# EAGLE board Teensy-Maxuino-Slave-A4988-stepper 2x shield v3 backup (EAGLE 6.4)
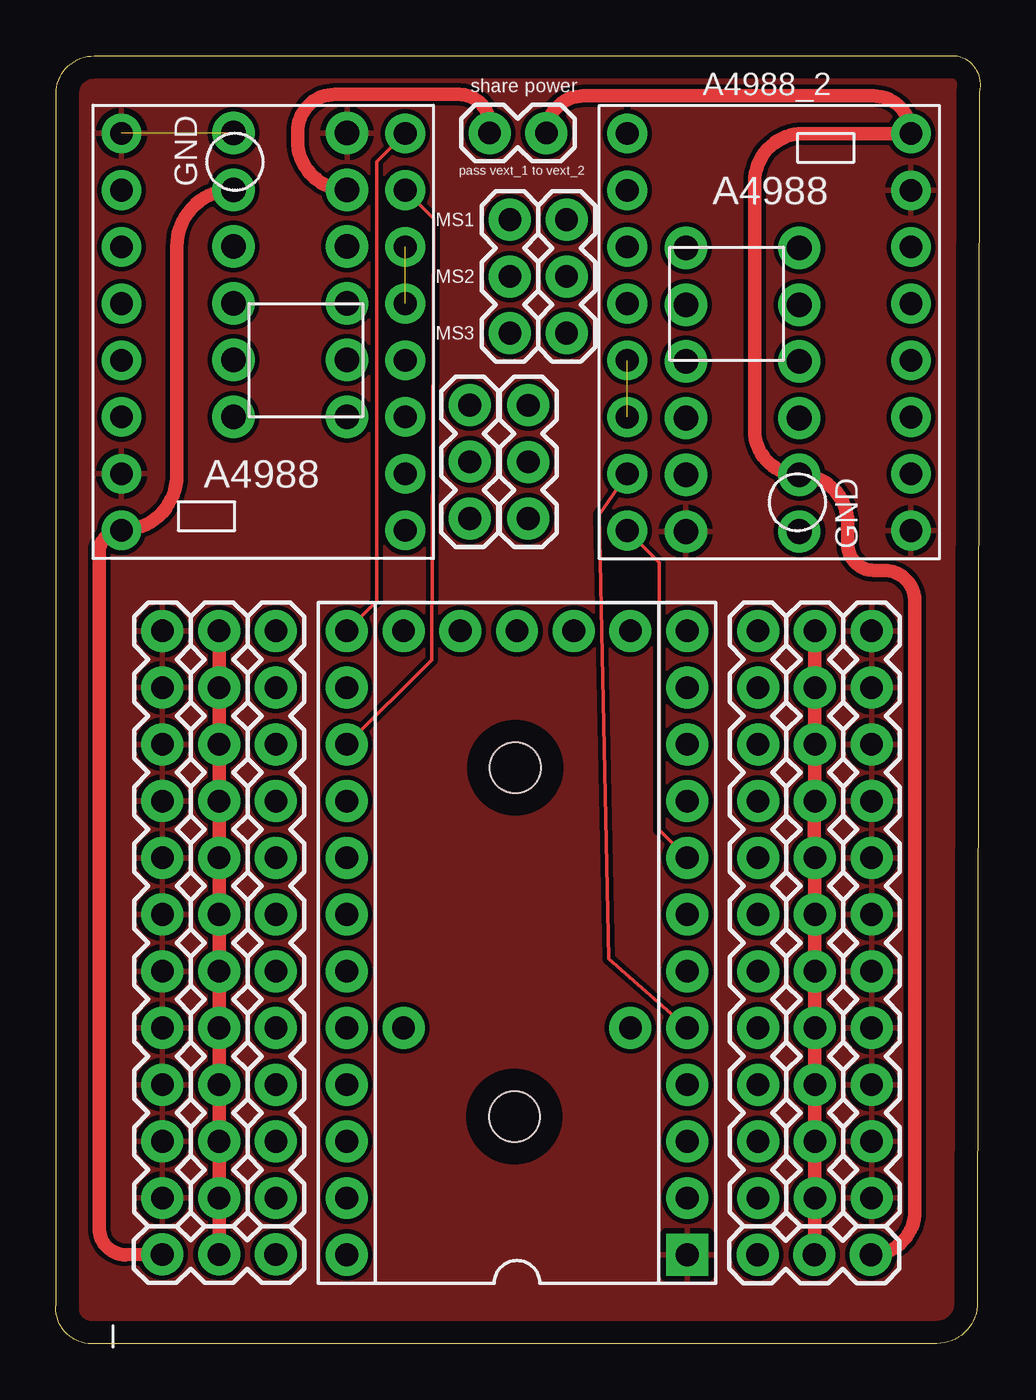
[diagram p0: board, top side]
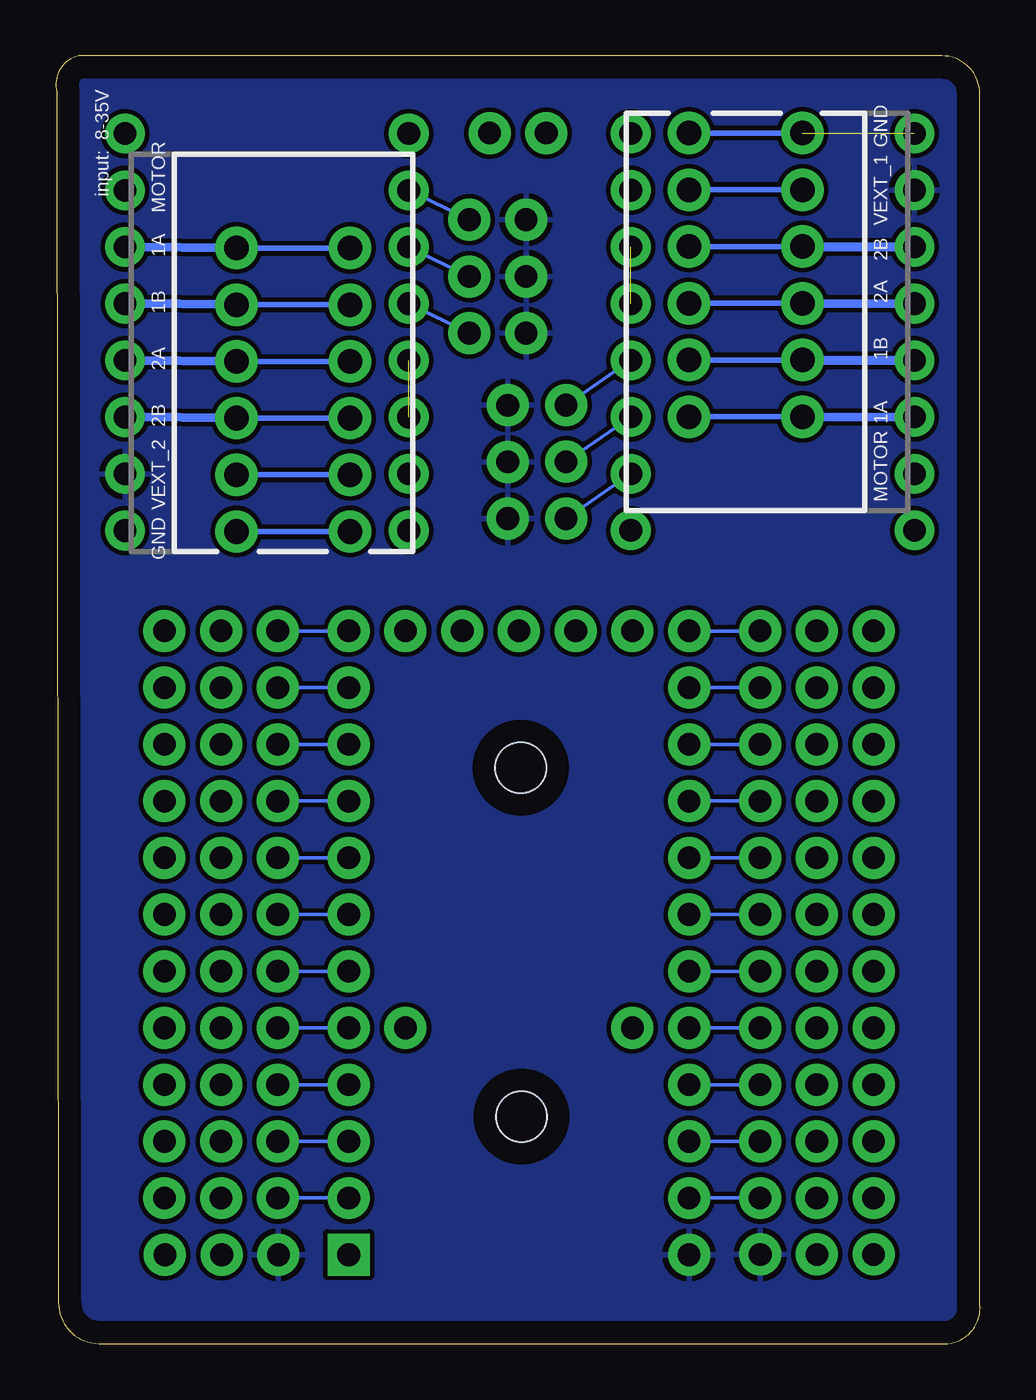
[diagram p1: board, bottom side, seen from below]

Size 41.38 x 57.68 mm. Coordinates in mm from the lower left corner, seen from the top.
Outline: 0.01,1.76 0.01,55.97 arc-90 1.72,57.68 40.36,57.68 arc-90 41.34,56.07 41.26,1.85 arc-90 39.45,0 1.44,0 arc-90 0.01,1.76
Copper layers (1*16): Top 0.035mm / dielectric 1.5mm / Bottom 0.035mm
Design rules "default *": minimum track width 6mil, minimum drill 24mil, track to track 8mil, track to pad 8mil, pad to pad 8mil, via to via 8mil, smd to smd 8mil, copper to edge 40mil, drill to drill 6mil, minimum pad ring 10mil, minimum via ring 8mil, stop-mask expansion 4mil, vias tented up to drill 0mil, thermal gap 10mil
Net classes: 0 default: width 0.152 mm, clearance 0.152 mm; 1 GND: width 0.406 mm, clearance 0.152 mm; 2 Power: width 0.406 mm, clearance 0.152 mm
Holes 2.26 mm at 20.53,10.17 20.57,25.8

## Footprints (pad centres in the part's own frame; a part is rotated, then mirrored left to right if it is on the bottom)
1X03 = drill 1.016 pad 1.88: 1 0,0; 2 2.54,0; 3 5.08,0
TEENSY = drill 1.016 pad 1.88: 5V2 13.97,-2.54; +5V -13.97,7.62; B0 -11.43,-7.62; B1 -8.89,-7.62; B2 -6.35,-7.62; B3 -3.81,-7.62; B4 8.89,7.62; B5 6.35,7.62; B6 3.81,7.62; B7 -1.27,-7.62; C6 11.43,-7.62; C7 13.97,-7.62; D0 1.27,-7.62; D1 3.81,-7.62; D2 6.35,-7.62; D3 8.89,-7.62; D4 13.97,5.08; D5 13.97,-5.08; D6 13.97,7.62; D7 11.43,7.62; E6 -3.81,-5.08; F0 -11.43,7.62; F1 -8.89,7.62; F4 -6.35,7.62; F5 -3.81,7.62; F6 -1.27,7.62; F7 1.27,7.62; GRND1 13.97,0; REF -3.81,5.08; RST 13.97,2.54 | drill 1.016 pad 1.88 square: GND -13.97,-7.62
POLOLU_A4988 = drill 1.016 pad 1.778: 1A 6.35,-1.27; 1B 6.35,-3.81; 2A 6.35,1.27; 2B 6.35,3.81; DIR -6.35,-8.89; EN -6.35,8.89; GND 6.35,-8.89; GND_MOT 6.35,6.35; MS1 -6.35,6.35; MS2 -6.35,3.81; MS3 -6.35,1.27; RST -6.35,-1.27; SLP -6.35,-3.81; STEP -6.35,-6.35; V_MOT 6.35,8.89; VDD 6.35,-6.35
1X11 = drill 1.016 pad 1.88: 1 0,0; 2 2.54,0; 3 5.08,0; 4 7.62,0; 5 10.16,0; 6 12.7,0; 7 15.24,0; 8 17.78,0; 9 20.32,0; 10 22.86,0; 11 25.4,0
1X02 = drill 1.016 pad 1.88: 1 0,0; 2 2.54,0
SPRINGTERMINAL-2.54MM-6 = drill 1.1 pad 1.9: 1 2.54,-2.54; 2 0,-2.54; 3 -2.54,-2.54; 4 -5.08,-2.54; 5 5.08,-2.54; 6 7.62,-2.54; P$1 2.54,2.54; P$2 0,2.54; P$3 -2.54,2.54; P$4 -5.08,2.54; P$5 5.08,2.54; P$6 7.62,2.54

## Placement (x,y rotation side)
+5V  [1X03]  21.15,36.95 90 top
+5V1  [1X03]  20.33,45.26 90 top
_1  TEENSY  [TEENSY]  20.65,17.95 90 top
A4988_1  POLOLU_A4988  [POLOLU_A4988]  9.29,45.31 180 top
A4988_2  POLOLU_A4988  [POLOLU_A4988]  31.93,45.3 0 top
GND_1  M11PTH  [1X11]  36.52,31.92 270 top
GND_2  M11PTH  [1X11]  4.77,31.92 270 top
MICROSTEP  [1X03]  18.53,42.04 270 top
MICROSTEP1  [1X03]  22.87,45.26 90 top
PINS_1  M11PTH  [1X11]  31.44,31.92 270 top
PINS_2  M11PTH  [1X11]  9.85,6.52 90 top
SHARE  [1X02]  19.42,54.22 0 top
STEPPER  [SPRINGTERMINAL-2.54MM-6]  10.5,46.59 90 bottom
STEPPER1  [SPRINGTERMINAL-2.54MM-6]  30.74,43.99 270 bottom
V+_1  M11PTH  [1X11]  33.98,31.92 270 top
V+_2  M11PTH  [1X11]  7.31,31.92 270 top
VSEL_1  [1X03]  36.49,3.98 180 top
VSEL_2  [1X03]  4.77,4 0 top

## Library data of the parts
+5V +5V1 GND_1 GND_2 V+_1 V+_2 = SparkFun-Connectors
_1 = aliEagleLib
A4988_1 = aliEagleLib; A4988_1: 1
A4988_2 = aliEagleLib; A4988_2: 2
MICROSTEP = SparkFun-Connectors; 5V: +5V; MS1: ms1; MS2: ms2; MS3: ms3
MICROSTEP1 = SparkFun-Connectors; MS1: ms1; MS2: ms2; MS3: ms3
PINS_1 = SparkFun-Connectors; GND: gnd; PINS: pins; V: V+
PINS_2 = SparkFun-Connectors; GND: gnd; PINS: pin; V: V+
SHARE = SparkFun-Connectors; P: pass vext_1 to vext_2; SHARE: share power
STEPPER = aliEagleLib; 1A: 1a; 1B: 1b; 2A: 2a; 2B: 2b; DC: input:; GND: gnd; MOTOR: motor; VEX: VEXT_1; VEX2: GND; VEXT: 8-35V
STEPPER1 = aliEagleLib; 1A: 1as; 1B: 1b; 2A: 2A; 2B: 2B; GND: GND; MOTOR: motor; VEXT_2: VEXT_2
VSEL_1 = SparkFun-Connectors; VCC: vcc; VEXT: vext
VSEL_2 = SparkFun-Connectors; VCC: VCC; VEXT: VEXT

## Nets
+5V: +5V1.1 +5V1.2 +5V1.3 +5V.1 +5V.2 +5V.3 _1.+5V A4988_1.VDD A4988_2.VDD VSEL_1.3 VSEL_2.3
DIR: _1.D6 A4988_1.DIR PINS_2.11
DIR1: _1.D1 A4988_2.DIR PINS_1.5
GND [GND]: _1.GND A4988_1.GND A4988_1.GND_MOT A4988_2.GND A4988_2.GND_MOT GND_1.1 GND_1.2 GND_1.3 GND_1.4 GND_1.5 GND_1.6 GND_1.7 GND_1.8 GND_1.9 GND_1.10 GND_1.11 GND_2.1 GND_2.2 GND_2.3 GND_2.4 GND_2.5 GND_2.6 GND_2.7 GND_2.8 GND_2.9 GND_2.10 GND_2.11 STEPPER1.P$6 STEPPER.P$6
N$1 [Power]: A4988_1.2B STEPPER.P$4
N$2 [Power]: A4988_1.2A STEPPER.P$3
N$3 [Power]: A4988_1.1A STEPPER.P$2
N$4 [Power]: A4988_1.1B STEPPER.P$1
N$5: A4988_2.RST A4988_2.SLP
N$6: A4988_1.RST A4988_1.SLP
N$7: A4988_2.MS1 MICROSTEP1.3
N$8: A4988_1.MS1 MICROSTEP.3
N$9: A4988_1.MS2 MICROSTEP.2
N$10: A4988_1.MS3 MICROSTEP.1
N$11: A4988_2.MS2 MICROSTEP1.2
N$12: A4988_2.MS3 MICROSTEP1.1
N$13: A4988_2.2B STEPPER1.P$4
N$14 [Power]: A4988_2.2A STEPPER1.P$3
N$15 [Power]: A4988_2.1A STEPPER1.P$2
N$16 [Power]: A4988_2.1B STEPPER1.P$1
N$17: _1.B0 PINS_1.11
N$18: _1.D0 PINS_1.6
N$19: _1.B7 PINS_1.7
N$20: _1.C6 PINS_1.2
N$21: _1.D3 PINS_1.3
N$22: _1.D2 PINS_1.4
N$23: _1.C7 PINS_1.1
N$24: _1.B2 PINS_1.9
N$25: _1.B1 PINS_1.10
N$26: _1.F4 PINS_2.3
N$27: _1.F5 PINS_2.4
N$28: _1.F6 PINS_2.5
N$29: _1.F7 PINS_2.6
N$30: _1.B6 PINS_2.7
N$31: _1.B5 PINS_2.8
N$32: _1.D7 PINS_2.10
N$33: _1.F0 PINS_2.1
N$34: _1.F1 PINS_2.2
STEP: _1.B4 A4988_1.STEP PINS_2.9
STEP1: _1.B3 A4988_2.STEP PINS_1.8
V+_1: V+_1.1 V+_1.2 V+_1.3 V+_1.4 V+_1.5 V+_1.6 V+_1.7 V+_1.8 V+_1.9 V+_1.10 V+_1.11 VSEL_1.2
V+_2: V+_2.1 V+_2.2 V+_2.3 V+_2.4 V+_2.5 V+_2.6 V+_2.7 V+_2.8 V+_2.9 V+_2.10 V+_2.11 VSEL_2.2
VIN [Power]: A4988_1.V_MOT SHARE.1 STEPPER.P$5 VSEL_2.1
VIN_2 [Power]: A4988_2.V_MOT SHARE.2 STEPPER1.P$5 VSEL_1.1

## Tracks (layer width: path | path; a pad name or v marks a point on that pad's centre or on a via)
+5V
  pour Bottom: 40.97,57.71 40.97,0.49 0.96,0.49 0.96,57.39
DIR
  Top 0.152: _1.D6 14.36,33.26 14.36,52.93 A4988_1.DIR
  Bottom 0.152: _1.D6 PINS_2.11
DIR1
  Top 0.152: _1.D1 27.01,23.01 27.01,34.98 A4988_2.DIR
  Bottom 0.152: PINS_1.5 _1.D1
GND  (1 unrouted)
  pour Top: 0.35,2.81 arc90 1.8,0.44 39.42,0.44 arc90 40.86,1.99 41.15,56.29 arc90 39.91,57.22 0.41,57.25
N$1
  Bottom 0.406: 7.96,41.51 A4988_1.2B
N$2
  Bottom 0.406: 7.96,44.05 A4988_1.2A
N$3
  Bottom 0.406: 7.96,46.59 A4988_1.1A
N$4
  Bottom 0.406: 7.96,49.13 A4988_1.1B
N$5  (1 unrouted)
N$6  (1 unrouted)
N$7
  Bottom 0.152: MICROSTEP1.3 A4988_2.MS1
N$8
  Bottom 0.152: MICROSTEP.3 A4988_1.MS1
N$9
  Bottom 0.152: A4988_1.MS2 MICROSTEP.2
N$10
  Bottom 0.152: MICROSTEP.1 A4988_1.MS3
N$11
  Bottom 0.152: A4988_2.MS2 MICROSTEP1.2
N$12
  Bottom 0.152: MICROSTEP1.1 A4988_2.MS3
N$13
  Bottom 0.406: 33.28,49.07 A4988_2.2B
N$14
  Bottom 0.406: 33.28,46.53 A4988_2.2A
N$15
  Bottom 0.406: 33.28,43.99 A4988_2.1A
N$16
  Bottom 0.406: 33.28,41.45 A4988_2.1B
N$17
  Bottom 0.152: PINS_1.11 _1.B0
N$18
  Bottom 0.152: PINS_1.6 _1.D0
N$19
  Bottom 0.152: _1.B7 PINS_1.7
N$20
  Bottom 0.152: _1.C6 PINS_1.2
N$21
  Bottom 0.152: PINS_1.3 _1.D3
N$22
  Bottom 0.152: _1.D2 PINS_1.4
N$23
  Bottom 0.152: _1.C7 PINS_1.1
N$24
  Bottom 0.152: PINS_1.9 _1.B2
N$25
  Bottom 0.152: _1.B1 PINS_1.10
N$26
  Bottom 0.152: PINS_2.3 _1.F4
N$27
  Bottom 0.152: _1.F5 PINS_2.4
N$28
  Bottom 0.152: PINS_2.5 _1.F6
N$29
  Bottom 0.152: _1.F7 PINS_2.6
N$30
  Bottom 0.152: PINS_2.7 _1.B6
N$31
  Bottom 0.152: _1.B5 PINS_2.8
N$32
  Bottom 0.152: PINS_2.10 _1.D7
N$33
  Bottom 0.152: PINS_2.1 _1.F0
N$34
  Bottom 0.152: _1.F1 PINS_2.2
STEP
  Top 0.152: _1.B4 16.83,30.62 16.92,50.39 A4988_1.STEP
  Bottom 0.152: _1.B4 PINS_2.9
STEP1
  Top 0.152: _1.B3 24.75,17.24 24.34,37.13 A4988_2.STEP
  Bottom 0.152: PINS_1.8 _1.B3
V+_1
  Top 0.61: V+_1.1 V+_1.2 V+_1.3 V+_1.4 33.93,21.81 V+_1.5 V+_1.6 V+_1.7 V+_1.8 V+_1.9 V+_1.10 V+_1.11 33.98,4.01 arc-90 VSEL_1.2
V+_2
  Top 0.61: V+_2.1 V+_2.2 V+_2.3 V+_2.4 V+_2.5 V+_2.6 V+_2.7 V+_2.8 V+_2.9 V+_2.10 V+_2.11 VSEL_2.2 arc90 VSEL_2.2
VIN  (1 unrouted)
  Top 0.61: VSEL_2.1 3.13,3.98 arc-90 1.93,5.18 1.93,35.42 arc-90 A4988_1.V_MOT arc90 5.41,38.9 5.41,49.13 arc-90 7.96,51.67 | SHARE.1 19.42,54.57 arc90 18.04,55.95 12.5,55.95 arc90 10.82,54.27 10.82,53.89 arc90 STEPPER.P$5
VIN_2  (1 unrouted)
  Top 0.61: SHARE.2 arc-90 23.63,55.88 36.59,55.88 arc-90 A4988_2.V_MOT arc90 A4988_2.V_MOT 33.47,54.2 arc90 31.28,52.02 31.28,40.91 arc90 33.28,38.91 arc-90 35.45,36.74 35.45,35.8 arc90 36.62,34.63 37.09,34.63 arc-90 38.46,33.26 38.46,5.95 arc-90 VSEL_1.1